# EAGLE board dorbell (EAGLE 6.3)
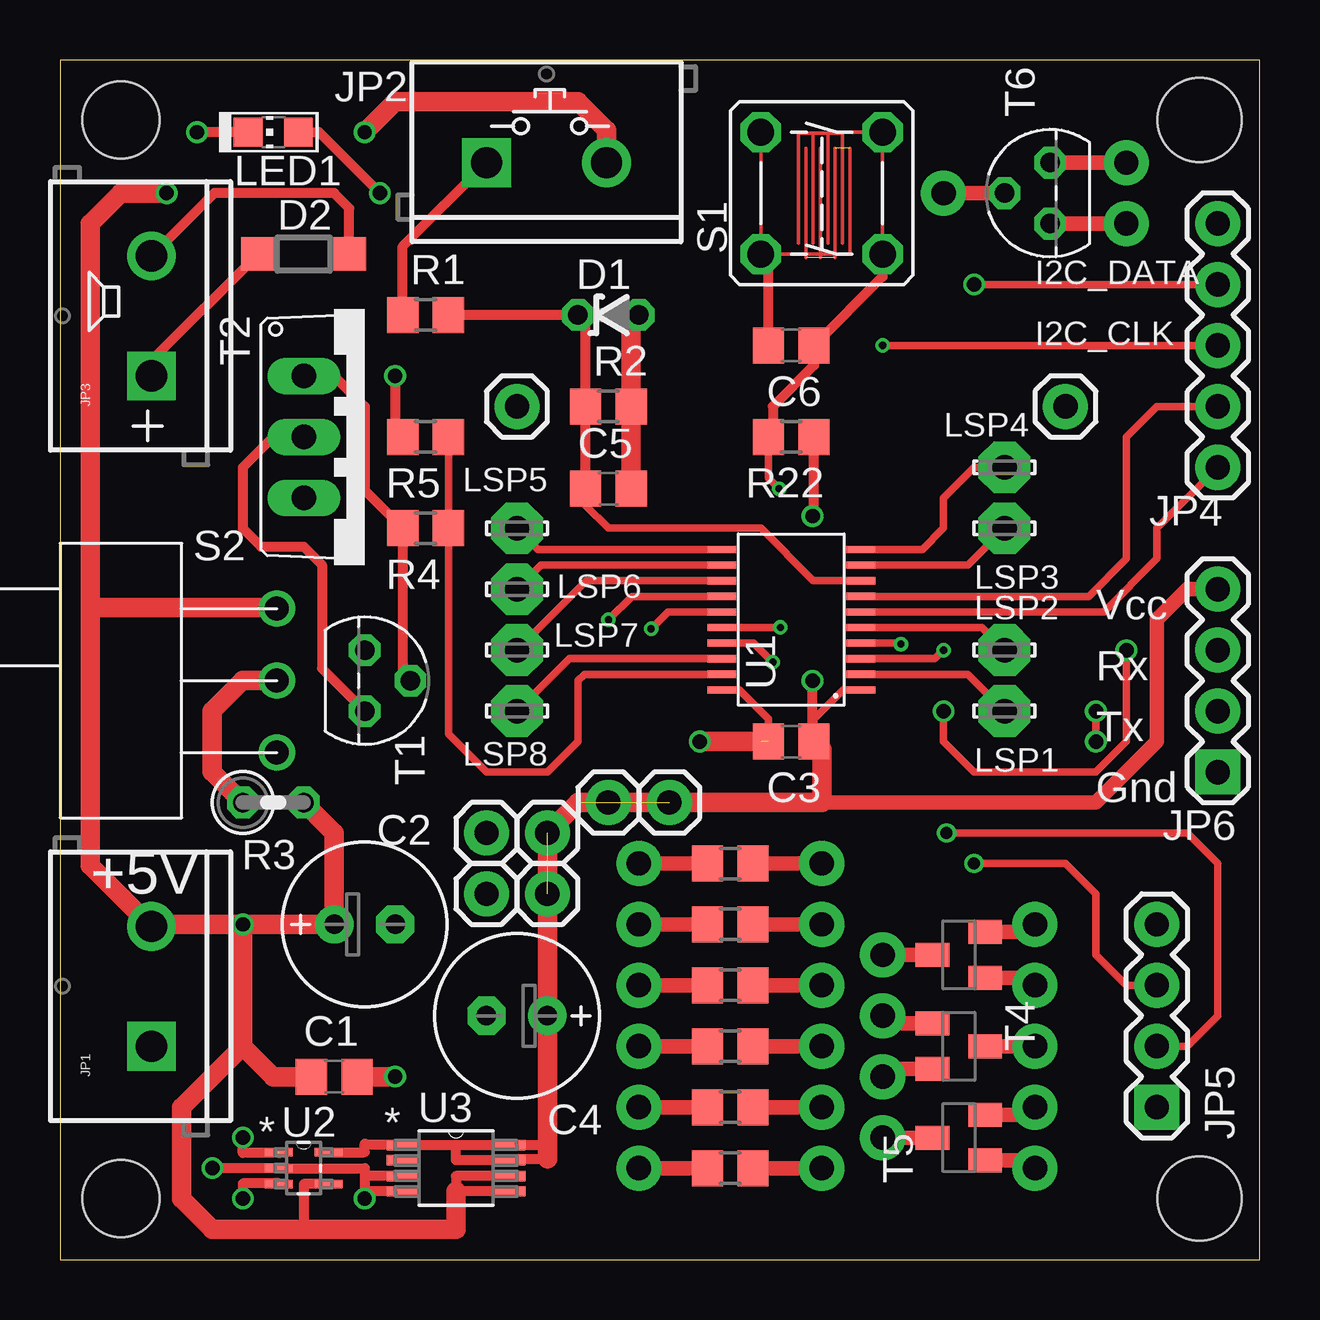
[diagram p0: board, top side]
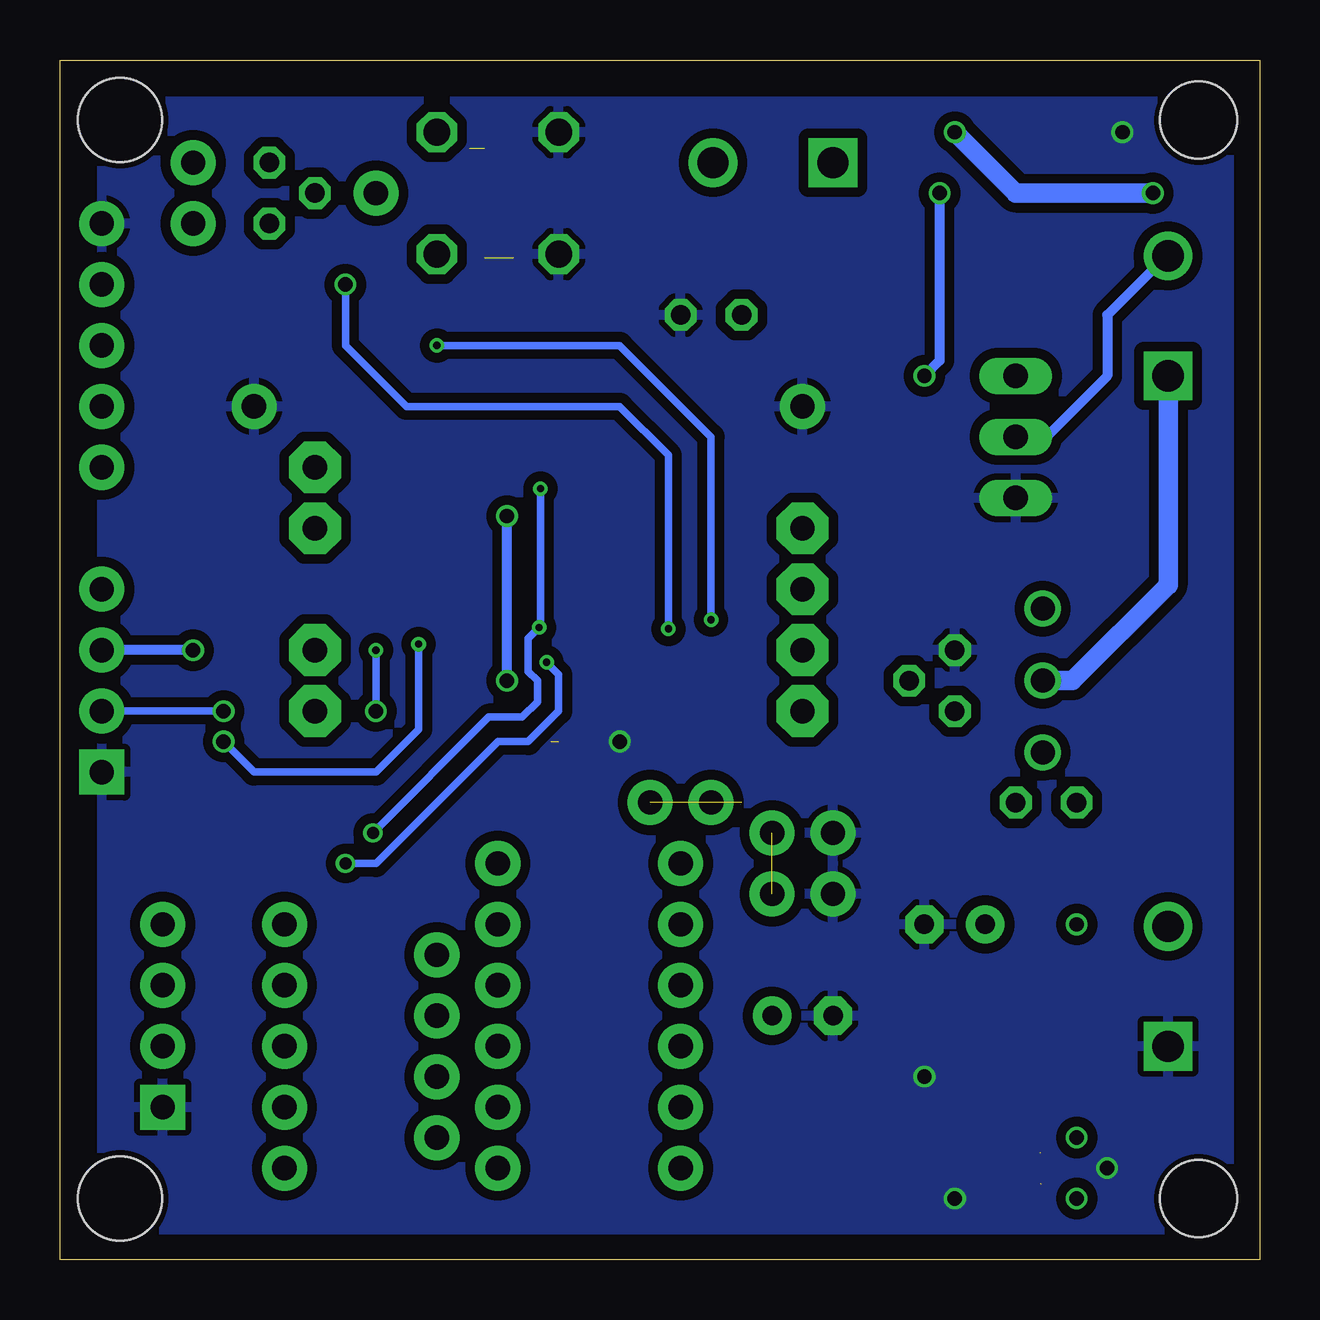
[diagram p1: board, bottom side, seen from below]

Size 50 x 50 mm. Coordinates in mm from the lower left corner, seen from the top.
Outline: 0,0 50,0 50,50 0,50 0,0
Copper layers (1*16): Top 0.035mm / dielectric 1.5mm / Bottom 0.035mm
Design rules "Fusion_eagle_rule_v1.1 *": minimum track width 6mil, minimum drill 22mil, track to track 6mil, track to pad 6mil, pad to pad 6mil, via to via 6mil, smd to smd 0mil, copper to edge 10mil, drill to drill 10mil, minimum pad ring 10mil, minimum via ring 6mil, stop-mask expansion 2mil, vias tented up to drill 100mil, thermal gap 10mil
Net classes: 0 default: width 0.254 mm, clearance 0.152 mm; 1 5V: width 0.305 mm, clearance 0.152 mm; 2 3V: width 0.305 mm, clearance 0.152 mm; 3 GND: width 0.305 mm, clearance 0.406 mm
Holes 3.2 mm at 2.54,2.54 2.54,47.5
Holes 3.5 mm at 47.5,2.54 47.5,47.5

## Footprints (pad centres in the part's own frame; a part is rotated, then mirrored left to right if it is on the bottom)
C0805 = smd 1.3 x 1.5: 1 -0.95,0; 2 0.95,0
E2,5-7 = drill 0.813 pad 1.6: + -1.27,0 | drill 0.813 pad 1.6 octagon: - 1.27,0
ZDIO-2.5 = drill 0.813 octagon: A 1.27,0; C -1.27,0
SOD123 = smd 1.4 x 1.4: A 1.9,0; C -1.9,0
SCREWTERMINAL-5MM-2 = drill 1.3 pad 2.032 square: 1 0,0 | drill 1.3 pad 2.032: 2 5,0
1X05 = drill 1.016 pad 1.88: 1 0,0; 2 2.54,0; 3 5.08,0; 4 7.62,0; 5 10.16,0
1X04 = drill 1.016 pad 1.88 square: 1 0,0 | drill 1.016 pad 1.88: 2 2.54,0; 3 5.08,0; 4 7.62,0
1X01NS = drill 1.016 pad 1.88: 1 0,0
1X01 = drill 1.016 pad 1.88: 1 0,0
CHIP-LED0805 = smd 1.2 x 1.2: A 0,-1.05; C 0,1.05
LSP10 = drill 1.016 pad 2.159 octagon: MP 0,0
R0805 = smd 1.3 x 1.5: 1 -0.95,0; 2 0.95,0
0207/2V = drill 0.813 octagon: 1 -1.27,0; 2 1.27,0
DTE6 = drill 1.118 octagon: 1 -2.54,2.54; 2 2.54,2.54; 3 2.54,-2.54; 4 -2.54,-2.54
SWITCH_SLIDE = drill 1: P$1 6.5,3; P$2 6.5,0; P$3 6.5,-3
TO92 = drill 0.813 octagon: 1 1.27,0; 2 0,1.905; 3 -1.27,0
TO220V = drill 1.016 long: 1 -2.54,-2.54; 2 0,-2.54; 3 2.54,-2.54
SOT23-BEC = smd 1 x 1.4: B -0.95,-1.1; C 0,1.1; E 0.95,-1.1
TO92-E1 = drill 0.813 octagon: 1 -1.27,0; 2 0,1.905; 3 1.27,0
PW20 = smd 0.3 x 1.2: 1 -2.925,-2.9; 2 -2.275,-2.9; 3 -1.625,-2.9; 4 -0.975,-2.9; 5 -0.325,-2.9; 6 0.325,-2.9; 7 0.975,-2.9; 8 1.625,-2.9; 9 2.275,-2.9; 10 2.925,-2.9; 11 2.925,2.9; 12 2.275,2.9; 13 1.625,2.9; 14 0.975,2.9; 15 0.325,2.9; 16 -0.325,2.9; 17 -0.975,2.9; 18 -1.625,2.9; 19 -2.275,2.9; 20 -2.925,2.9
DCK5 = smd 1.168 x 0.356: 1 -1.041,0.66; 2 -1.041,0; 3 -1.041,-0.66; 4 1.041,-0.66; 5 1.041,0.66
DGK8 = smd 1.422 x 0.432: 1 -2.184,0.965; 2 -2.184,0.33; 3 -2.184,-0.33; 4 -2.184,-0.965; 5 2.184,-0.965; 6 2.184,-0.33; 7 2.184,0.33; 8 2.184,0.965

## Placement (x,y rotation side)
C1  [C0805]  11.43,7.62 0 top
C2  [E2,5-7]  12.7,13.97 0 top
C3  [C0805]  30.48,21.59 180 top
C4  [E2,5-7]  19.05,10.16 180 top
C5  [C0805]  22.86,32.13 0 top
C6  [C0805]  30.48,38.1 180 top
D1  3.3V  [ZDIO-2.5]  22.86,39.37 0 top
D2  1N4148  [SOD123]  10.16,41.91 0 top
JP1  T1  [SCREWTERMINAL-5MM-2]  3.81,8.89 90 top
JP2  T1  [SCREWTERMINAL-5MM-2]  17.78,45.72 0 top
JP3  T1  [SCREWTERMINAL-5MM-2]  3.81,36.83 90 top
JP4  [1X05]  48.26,43.18 270 top
JP5  [1X04]  45.72,6.35 90 top
JP6  [1X04]  48.26,20.32 90 top
JP7  M01SMDNS  [1X01NS]  31.75,16.51 0 top
JP8  M01SMDNS  [1X01NS]  24.13,16.51 0 top
JP9  M01SMDNS  [1X01NS]  31.75,13.97 0 top
JP10  M01SMDNS  [1X01NS]  24.13,13.97 0 top
JP11  M01SMDNS  [1X01NS]  31.75,11.43 0 top
JP12  M01SMDNS  [1X01NS]  24.13,11.43 0 top
JP13  M01SMDNS  [1X01NS]  31.75,8.89 0 top
JP14  M01SMDNS  [1X01NS]  24.13,8.89 0 top
JP15  M01SMDNS  [1X01NS]  31.75,6.35 0 top
JP16  M01SMDNS  [1X01NS]  24.13,6.35 0 top
JP17  M01SMDNS  [1X01NS]  31.75,3.81 0 top
JP18  M01SMDNS  [1X01NS]  24.13,3.81 0 top
JP19  M01SMDNS  [1X01NS]  40.64,11.43 0 top
JP20  M01SMDNS  [1X01NS]  34.29,12.7 0 top
JP21  M01SMDNS  [1X01NS]  40.64,13.97 0 top
JP22  M01SMDNS  [1X01NS]  34.29,10.16 0 top
JP23  M01SMDNS  [1X01NS]  40.64,8.89 0 top
JP24  M01SMDNS  [1X01NS]  34.29,7.62 0 top
JP25  M01SMDNS  [1X01NS]  40.64,3.81 0 top
JP26  M01SMDNS  [1X01NS]  34.29,5.08 0 top
JP27  M01SMDNS  [1X01NS]  40.64,6.35 0 top
JP28  M01SMDNS  [1X01NS]  36.83,44.45 0 top
JP29  M01SMDNS  [1X01NS]  44.45,43.18 0 top
JP30  M01SMDNS  [1X01NS]  44.45,45.72 0 top
JP31  M01PTH  [1X01]  41.91,35.56 0 top
JP32  M01PTH  [1X01]  19.05,35.56 0 top
JP33  M01PTH  [1X01]  17.78,17.78 0 top
JP34  M01PTH  [1X01]  17.78,15.24 0 top
JP35  M01PTH  [1X01]  20.32,15.24 0 top
JP36  M01PTH  [1X01]  25.4,19.05 0 top
JP37  M01PTH  [1X01]  22.86,19.05 0 top
JP38  M01PTH  [1X01]  20.32,17.78 0 top
LED1  GREEN  [CHIP-LED0805]  8.89,46.99 90 top
LSP1  LSP10  [LSP10]  39.37,22.86 180 top
LSP2  LSP10  [LSP10]  39.37,25.4 180 top
LSP3  LSP10  [LSP10]  39.37,30.48 180 top
LSP4  LSP10  [LSP10]  39.37,33.02 180 top
LSP5  LSP10  [LSP10]  19.05,30.48 180 top
LSP6  LSP10  [LSP10]  19.05,27.94 180 top
LSP7  LSP10  [LSP10]  19.05,25.4 180 top
LSP8  LSP10  [LSP10]  19.05,22.86 180 top
R1  470  [R0805]  15.24,39.37 0 top
R2  4.7K  [R0805]  22.86,35.56 180 top
R3  4.7K  [0207/2V]  8.89,19.05 0 top
R4  470  [R0805]  15.24,30.48 180 top
R5  470  [R0805]  15.24,34.29 180 top
R6  4.7K  [R0805]  27.94,16.51 0 top
R7  4.7K  [R0805]  27.94,13.97 0 top
R8  4.7K  [R0805]  27.94,11.43 0 top
R9  4.7K  [R0805]  27.94,8.89 0 top
R10  4.7K  [R0805]  27.94,6.35 0 top
R11  4.7K  [R0805]  27.94,3.81 0 top
R22  47K  [R0805]  30.48,34.29 0 top
S1  DTE6  [DTE6]  31.75,44.45 90 top
S2  SWITCH_2DIR  [SWITCH_SLIDE]  2.54,24.13 0 top
T1  2N3904  [TO92]  12.7,24.13 270 top
T2  BD537  [TO220V]  12.7,34.29 270 top
T3  [SOT23-BEC]  37.47,12.7 90 top
T4  [SOT23-BEC]  37.47,8.89 270 top
T5  [SOT23-BEC]  37.47,5.08 90 top
T6  [TO92-E1]  41.27,44.45 90 top
U1  G2XX3---PW20  [PW20]  30.48,26.67 90 top
U2  TPS71533_DCK_5  [DCK5]  10.16,3.81 0 top
U3  TPS77333  [DGK8]  16.51,3.81 0 top

## Library data of the parts
C1-C6 R1-R11 R22 = rcl
D1 D2 = diode
JP1-JP3 JP7-JP30 = SparkFun
JP4-JP6 JP31-JP38 = SparkFun-Connectors
LED1 S1 S2 = jlab
LSP1-LSP8 = solpad
T1-T6 = transistor
U1 = TI_MSP430_v16
U2 = ti_exports; DATASHEETURL: http://www.ti.com/lit/gpn/TPS71533; DESCRIPTION: Single Output LDO, 50mA, Fixed(3.3V), High Input Voltage, Low Quiescent Current; FAMILY_NAME: SINGLE CHANNEL LDO; GENERIC_PART_NUMBER: TPS71533; INDUSTRY_STD_PKG_TYPE: SC70; MANUFACTURER: Texas Instruments; MANUFACTURER_PART_NUMBER: tps71533_dck_5; PACKAGE_DESIGNATOR: DCK; PIN_COUNT: 5; VENDOR: Texas Instruments
U3 = ti_exports

## Nets
+5V [5V]: C1.1 C2.+ JP1.2 JP2.2 R3.2 S2.P$1 U2.4 U3.5 U3.6
BTN: C5.1 D1.C R1.2 R2.2 U1.8
GND [GND]: C1.2 C2.- C3.2 C4.- C5.2 C6.2 D1.A JP1.1 JP4.1 JP5.1 JP6.1 JP31.1 JP32.1 JP33.1 JP34.1 LED1.C R2.1 S1.1 S1.2 T1.3 T2.3 U1.20 U2.2 U3.3 U3.4
I2C_CLK: JP4.3 U1.14
I2C_DATA: JP4.2 U1.15
N$1: D2.A JP3.2 T1.1 T2.2
N$2: D2.C JP3.1 R3.1 S2.P$2
N$3: R4.2 T1.2 T2.1
N$4: JP2.1 R1.1
N$5: LED1.A R5.2
N$8: JP7.1 R6.2
N$9: JP8.1 R6.1
N$10: JP9.1 R7.2
N$11: JP10.1 R7.1
N$12: JP11.1 R8.2
N$13: JP12.1 R8.1
N$14: JP13.1 R9.2
N$15: JP14.1 R9.1
N$16: JP15.1 R10.2
N$17: JP16.1 R10.1
N$18: JP17.1 R11.2
N$19: JP18.1 R11.1
N$20: JP19.1 T3.B
N$21: JP20.1 T3.C
N$22: JP21.1 T3.E
N$23: JP22.1 T4.B
N$24: JP23.1 T4.C
N$25: JP24.1 T4.E
N$26: JP25.1 T5.B
N$27: JP26.1 T5.C
N$28: JP27.1 T5.E
N$29: JP28.1 T6.2
N$30: JP29.1 T6.1
N$31: JP30.1 T6.3
N$32: U2.3
N$33: U2.1
P1.0: LSP1.MP U1.2
P1.3: LSP2.MP U1.5
P2.1: LSP3.MP U1.9
P2.2: LSP4.MP U1.10
P2.3: LSP5.MP U1.11
P2.4: LSP6.MP U1.12
P2.5: LSP7.MP U1.13
P2.7: LSP8.MP U1.18
PWM: R4.1 R5.1 U1.19
RST: C6.1 JP5.2 R22.1 S1.3 S1.4 U1.16
RXD: JP6.3 U1.3
TEST: JP5.3 U1.17
TXD: JP6.2 U1.4
UCB0CLK: JP4.4 U1.7
UCB0STE: JP4.5 U1.6
VCC: C3.1 C4.+ JP6.4 JP35.1 JP36.1 JP37.1 JP38.1 R22.2 U1.1 U2.5 U3.1 U3.7 U3.8

## Tracks (layer width: path | path; a pad name or v marks a point on that pad's centre or on a via)
+5V  (via drill 0.6)
  Top 0.406: U2.4 10.16,3.15 10.16,1.27 16.51,1.27 | U3.5 16.51,2.85 16.51,3.48 U3.6
  Top 0.813: 16.51,2.85 16.51,1.27 6.35,1.27 5.08,2.54 5.08,6.35 7.62,8.89 | v7.62,13.97 C2.+ 11.43,17.78 R3.2 | v7.62,13.97 3.81,13.97 JP1.2 1.27,16.43 1.27,27.18 | v7.62,13.97 7.62,8.89 | C1.1 8.89,7.62 7.62,8.89 | JP2.2 22.78,47.07 21.59,48.26 13.97,48.26 v12.7,46.99 | v4.45,44.45 2.54,44.45 1.27,43.18 1.27,27.18 | S2.P$1 8.99,27.18 1.27,27.18
  Bottom 0.813: v12.7,46.99 10.16,44.45 v4.45,44.45
BTN
  Top 0.305: 21.91,39.05 D1.C | C5.1 21.91,31.43 22.86,30.48 29.21,30.48 31.39,28.3 U1.8
  Top 0.406: C5.1 R2.2 21.91,39.05 | D1.C R1.2
GND  (via drill 0.6)  (4 unrouted)
  Top 0.152: S1.2 S1.1 32.92,41.91 32.92,46.33 | 31.09,41.76 31.09,46.33 | 31.7,41.76 31.7,46.33 | 32.31,41.76 32.31,46.33
  Top 0.305: U1.20 28.32,23.75 29.53,22.54 C3.2
  Top 0.406: 9.14,3.81 12.7,3.81 v12.7,2.54 12.7,2.85 | U2.2 v6.35,3.81 | U3.3 12.7,3.48 12.7,2.85 | U3.4 12.7,2.85 | LED1.C v5.71,46.99 | C3.2 29.53,21.8 | C6.2 29.53,41.59 S1.1
  Top 0.813: C1.2 v13.97,7.62 | 29.21,21.59 v26.67,21.59 | C5.2 R2.1 23.81,39.37 D1.A
  pour Bottom: 1.27,48.26 48.26,48.26 48.26,1.27 1.27,1.27
I2C_CLK  (via drill 0.3)
  Top 0.305: U1.14 23.84,27.64 v22.86,26.67 | v34.29,38.1 JP4.3
  Bottom 0.305: v22.86,26.67 22.86,34.29 26.67,38.1 v34.29,38.1
I2C_DATA  (via drill 0.3, 0.6)
  Top 0.305: U1.15 25.34,27 v24.64,26.29 | v38.1,40.64 JP4.2
  Bottom 0.305: v24.64,26.29 24.64,33.53 26.67,35.56 35.56,35.56 38.1,38.1 v38.1,40.64
N$1
  Top 0.406: D2.A 12.06,43.82 11.43,44.45 6.43,44.45 JP3.2 | T2.2 8.89,34.29 7.62,33.02 7.62,30.48 8.38,29.72 10.16,29.72 10.92,28.96 10.92,24.64 T1.1
  Bottom 0.305: JP3.2 3.89,41.83
  Bottom 0.406: 3.89,41.83 6.35,39.37 6.35,36.83 8.89,34.29 T2.2
N$2
  Top 0.406: JP3.1 3.81,37.46 D2.C
  Top 0.813: R3.1 6.35,20.32 6.35,22.86 7.62,24.13 S2.P$2
  Bottom 0.813: JP3.1 3.81,28.12 7.8,24.13 S2.P$2
N$3
  Top 0.406: T2.1 11.43,36.83 12.7,35.56 12.7,32.07 R4.2 14.29,24.45 T1.2
N$4
  Top 0.406: R1.1 14.29,42.23 JP2.1
N$5  (via drill 0.6)
  Top 0.406: LED1.A 10.79,46.99 v13.34,44.45 | v13.97,36.83 13.97,34.61 R5.2
  Bottom 0.406: v13.34,44.45 13.34,37.47 v13.97,36.83
N$8
  Top 0.61: JP7.1 R6.2
N$9
  Top 0.61: JP8.1 R6.1
N$10
  Top 0.61: JP9.1 R7.2
N$11
  Top 0.61: JP10.1 R7.1
N$12
  Top 0.61: JP11.1 R8.2
N$13
  Top 0.61: JP12.1 R8.1
N$14
  Top 0.61: JP13.1 R9.2
N$15
  Top 0.61: JP14.1 R9.1
N$16
  Top 0.61: JP15.1 R10.2
N$17
  Top 0.61: JP16.1 R10.1
N$18
  Top 0.61: JP17.1 R11.2
N$19
  Top 0.61: JP18.1 R11.1
N$20
  Top 0.61: T3.B 40.32,11.75 JP19.1
N$21
  Top 0.61: T3.C JP20.1
N$22
  Top 0.61: T3.E 40.32,13.65 JP21.1
N$23
  Top 0.61: T4.B 34.61,9.84 JP22.1
N$24
  Top 0.61: T4.C JP23.1
N$25
  Top 0.61: T4.E 34.61,7.94 JP24.1
N$26
  Top 0.61: T5.B 40.32,4.13 JP25.1
N$27
  Top 0.61: T5.C JP26.1
N$28
  Top 0.61: T5.E 40.32,6.03 JP27.1
N$29
  Top 0.61: JP28.1 T6.2
N$30
  Top 0.61: T6.1 JP29.1
N$31
  Top 0.61: T6.3 JP30.1
N$32  (via drill 0.6)  (1 unrouted)
  Top 0.406: 9.14,3.17 7.62,3.17 v7.62,2.54
N$33  (via drill 0.6)  (1 unrouted)
  Top 0.406: 9.14,4.45 7.62,4.45 v7.62,5.08
P1.0
  Top 0.305: U1.2 37.84,24.39 LSP1.MP
P1.3
  Top 0.305: U1.5 38.42,26.34 LSP2.MP
P2.1
  Top 0.305: U1.9 37.84,28.95 LSP3.MP
P2.2
  Top 0.305: U1.10 35.95,29.59 36.83,30.48 36.83,31.75 38.1,33.02 LSP4.MP
P2.3
  Top 0.305: U1.11 19.93,29.59 LSP5.MP
P2.4
  Top 0.305: U1.12 20.05,28.95 LSP6.MP
P2.5
  Top 0.305: U1.13 21.95,28.3 LSP7.MP
P2.7
  Top 0.305: U1.18 21.23,25.05 LSP8.MP
PWM
  Top 0.305: U1.19 21.86,24.39 21.59,24.13 21.59,21.59 20.32,20.32 17.78,20.32 16.19,21.91 R4.1 R5.1
RST  (via drill 0.3, 0.5)
  Top 0.152: S1.4 S1.3 32.61,46.99 32.61,46.94 | 32.61,46.94 32.61,42.37 | 32.61,46.94 32,46.94 | 32,46.94 32,42.37 | 32,46.94 31.39,46.94 | 31.39,46.94 31.39,42.37 | 31.39,46.94 30.79,46.94 30.79,42.37
  Top 0.305: U1.16 v30.03,26.34 | 29.59,34.23 R22.1 29.53,32.57 v29.97,32.13 | v36.96,17.78 46.99,17.78 48.26,16.51 48.26,10.16 46.99,8.89 JP5.2
  Top 0.406: S1.4 34.29,40.96 C6.1 31.43,37.27 29.72,35.56 29.72,34.48 R22.1
  Bottom 0.305: v29.97,32.13 29.97,26.34 v30.03,26.34 30.48,25.89 30.48,24.51 30.1,24.13 30.1,23.24 30.73,22.61 32.13,22.61 v36.96,17.78
RXD  (via drill 0.3, 0.6)
  Top 0.305: U1.3 36.48,25.05 v36.83,25.4 | v36.83,22.86 36.83,21.59 38.1,20.32 43.18,20.32 44.45,21.59 v44.45,25.4
  Bottom 0.305: v36.83,25.4 v36.83,22.86
  Bottom 0.406: v44.45,25.4 JP6.3
TEST  (via drill 0.3, 0.5)
  Top 0.305: U1.17 28.91,25.7 v29.72,24.89 | v38.1,16.51 41.91,16.51 43.18,15.24 43.18,12.7 44.45,11.43 JP5.3
  Bottom 0.305: v29.72,24.89 29.21,24.38 29.21,22.86 30.48,21.59 31.75,21.59 36.83,16.51 v38.1,16.51
TXD  (via drill 0.3, 0.6)
  Top 0.305: U1.4 35.01,25.7 v35.05,25.65 | v43.18,21.59 v43.18,22.86
  Bottom 0.305: v35.05,25.65 35.05,22.1 36.83,20.32 41.91,20.32 v43.18,21.59 | v43.18,22.86 JP6.2
UCB0CLK
  Top 0.305: U1.7 42.88,27.64 44.45,29.21 44.45,34.29 45.72,35.56 JP4.4
UCB0STE
  Top 0.305: U1.6 43.51,27 45.72,29.21 45.72,30.48 JP4.5
VCC  (via drill 0.6)  (3 unrouted)
  Top 0.305: U1.1 32.63,23.75 31.43,22.54 C3.1
  Top 0.406: U2.5 12.7,4.47 12.7,4.78 | 12.7,4.78 U3.1 16.51,4.78 | 12.7,4.78 12.7,4.83 | 16.51,4.78 U3.8 20.32,4.78 | U3.7 16.51,4.14 16.51,4.78 | 18.67,4.19 20.32,4.19 | 31.43,21.8 C3.1 31.37,21.65 v31.37,24.13 | v31.37,30.99 31.43,31.05 R22.2
  Top 0.61: 31.75,19.05 43.18,19.05 45.72,21.59 45.72,26.67 46.99,27.94 JP6.4
  Top 0.813: 20.32,4.19 20.32,4.78 C4.+ JP38.1 21.59,19.05 31.75,19.05 31.75,21.27 C3.1
  Bottom 0.406: v31.37,24.13 v31.37,30.99

## Text on the board
tNames: I2C_DATA | I2C_CLK | Vcc | Rx | Tx | Gnd | +5V